# Altium PCB pyra_dvt1_power-2.0.PcbDoc
Units mm, origin at the board's own origin, x right, y up, seen from the top; angles counter-clockwise.
Board outline 250 x 177.5 mm, 2 copper layers (Top Layer, Bottom Layer); 72 components, 24 nets, 206 pads, 1 vias.
Unrouted connection lines stored in the file: 107.
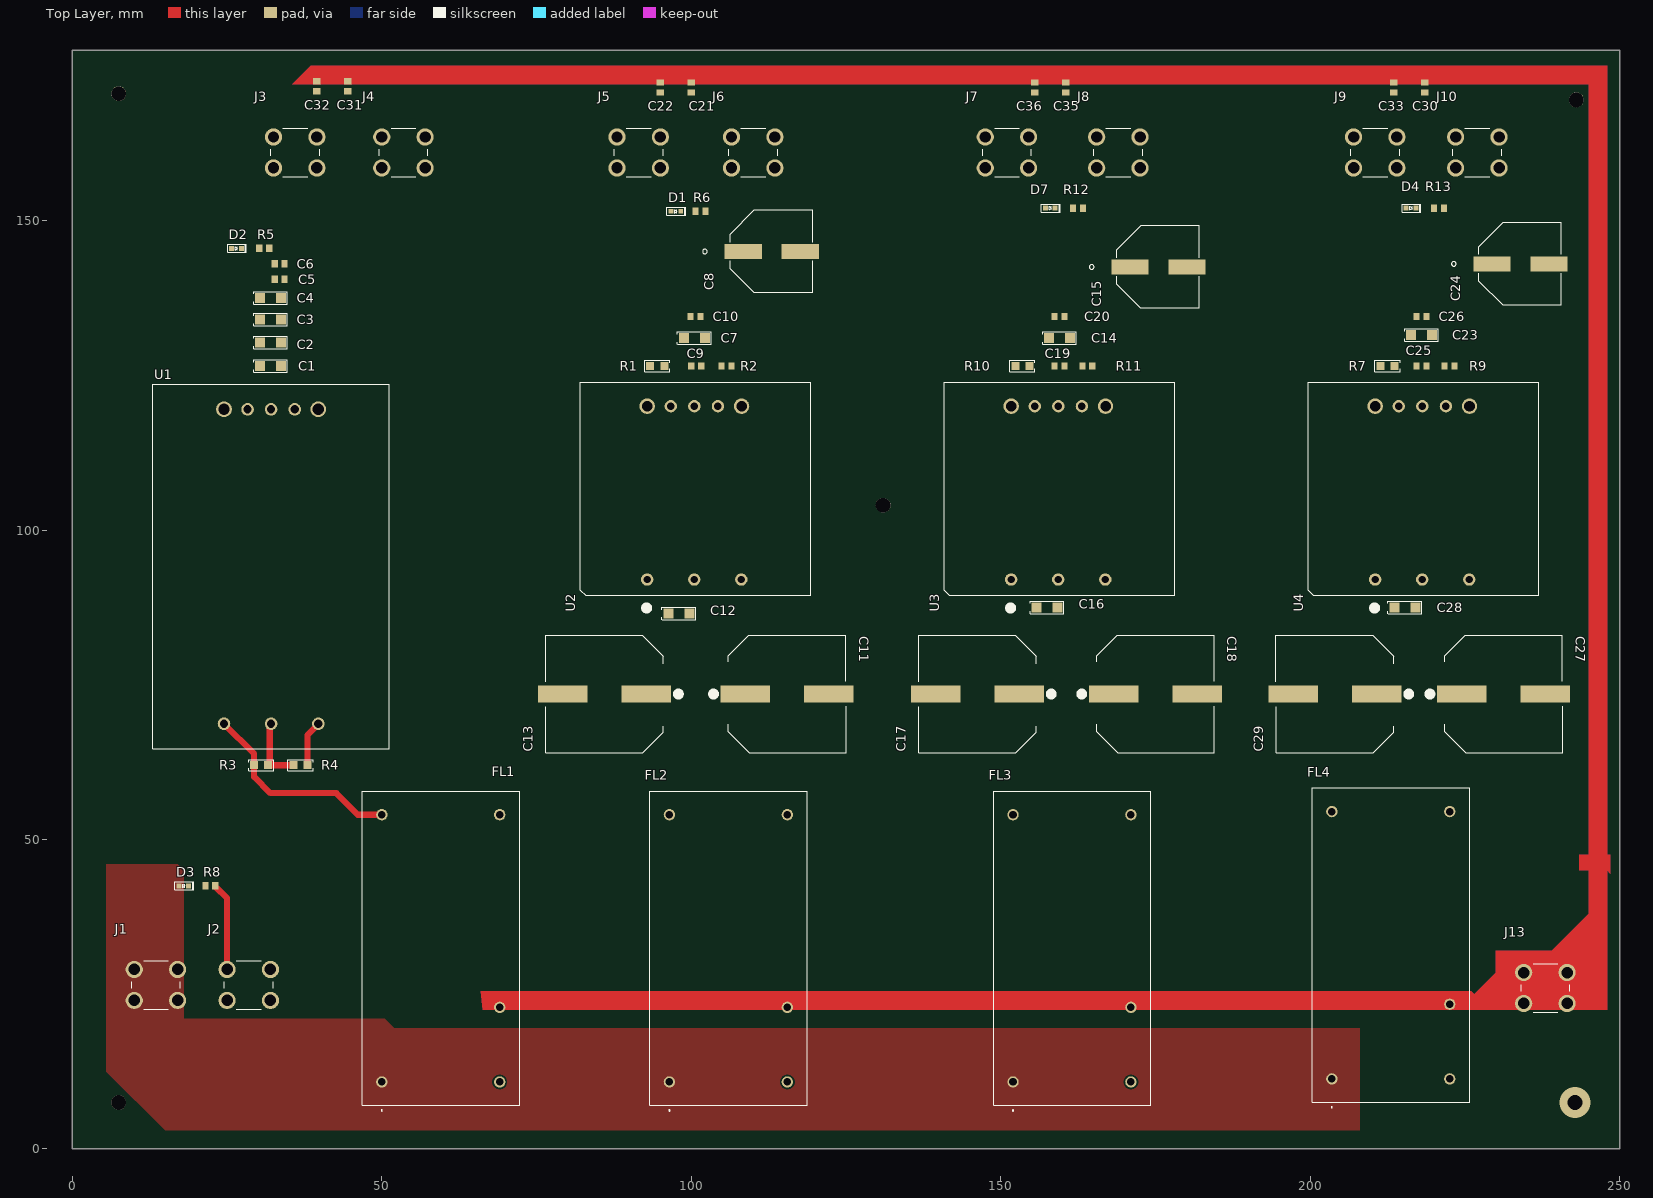
[diagram p0: Top Layer view]
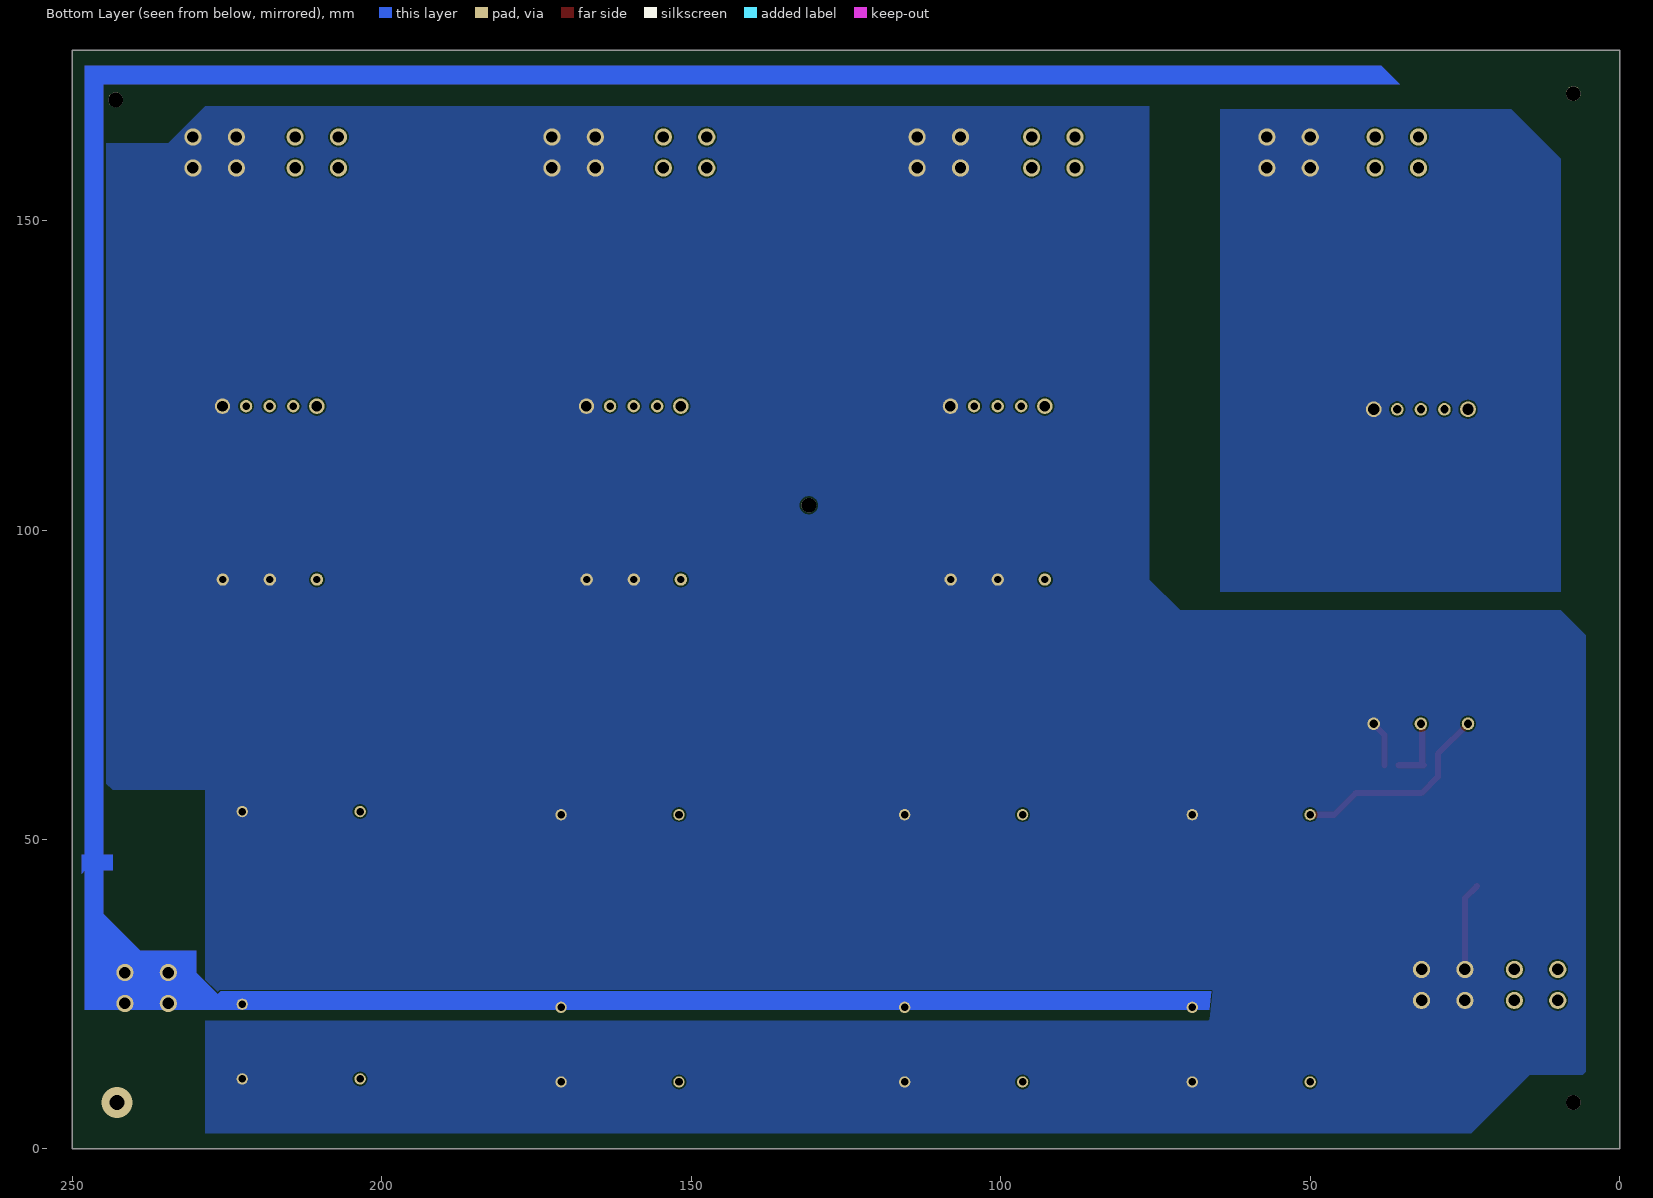
[diagram p1: Bottom Layer view, seen from below]

## Layer stack, top to bottom
Top Solder: solder mask 0.0102, Solder Resist, Dk 3.5
Top Layer: signal copper 0.0356
Dielectric 1: dielectric 0.32, FR-4, Dk 4.8
Bottom Layer: signal copper 0.0356
Bottom Solder: solder mask 0.0102, Solder Resist, Dk 3.5

## Board outline
0,0 0,177.5 250,177.5 250,0

## Design rules (kind name [scope] priority, off if disabled: settings)
Clearance [All] p1: gap=0.254 ignorepadtopadclearanceinfootprint=FALSE except(0: Arc-Hole Track-Hole SMDPad-Hole THPad-Hole Via-Hole Fill-Hole Poly-Hole Region-Hole Text-Hole)
PolygonConnect [All] p1: connectstyle=Direct reliefconductorwidth=0.254 reliefentries=4 polygonreliefangle="90 Angle" airgapwidth=0.254
RoutingVias [All] p1: holewidth=0.711 width=1.27 viastyle="Through Hole" minholewidth=0.711 minwidth=1.27 maxholewidth=0.711 maxwidth=1.27
SolderMaskExpansion [All] p1: expansion=0.102 istentingtop=FALSE
Width [All] p1: maxlimit=1 minlimit=0.1 preferedwidth=0.3
30 further rules are at their usual default settings.

## Components (designator, comment, footprint, x,y, rotation, side; value= is the part's Value field where it differs from the comment)
C1 "C1206_10UF_50V" 1206 32,126.5 r0 top value=10µF
C2 "C1206_10UF_50V" 1206 32,130.313 r0 top value=10µF
C3 "C1206_10UF_50V" 1206 32,134 r0 top value=10µF
C4 "C1206_10UF_50V" 1206 32,137.5 r0 top value=10µF
C5 "C0603_100NF_50V" 0603R(1608) 33.5,140.5 r0 top value=100nF
C6 "C0603_100NF_50V" 0603R(1608) 33.5,143 r0 top value=100nF
C7 "C1206_10UF_50V" 1206 100.5,131 r0 top value=10µF
C8 "330uF/50V" EMVH500ARA331MKG5S 113,145 r0 top
C9 "C0603_100NF_50V" 0603R(1608) 100.8,126.5 r0 top value=100nF
C10 "C0603_100NF_50V" 0603R(1608) 100.7,134.5 r0 top value=100nF
C11 "220uF/100V" EMVH101GDA221MMN0S 115.5,73.5 r0 top
C12 "C1206_10UF_50V" 1206 98,86.5 r0 top value=10µF
C13 "220uF/100V" EMVH101GDA221MMN0S 86,73.5 r180 top
C14 "C1206_10UF_50V" 1206 159.5,131 r0 top value=10µF
C15 "330uF/50V" EMVH500ARA331MKG5S 175.5,142.5 r0 top
C16 "C1206_10UF_50V" 1206 157.5,87.5 r0 top value=10µF
C17 "220uF/100V" EMVH101GDA221MMN0S 146.25,73.5 r180 top
C18 "220uF/100V" EMVH101GDA221MMN0S 175,73.5 r0 top
C19 "C0603_100NF_50V" 0603R(1608) 159.5,126.5 r0 top value=100nF
C20 "C0603_100NF_50V" 0603R(1608) 159.5,134.5 r0 top value=100nF
C21 "C0603_100NF_50V" 0603R(1608) 100,171.5 r90 top value=100nF
C22 "C0603_100NF_50V" 0603R(1608) 95,171.5 r90 top value=100nF
C23 "C1206_10UF_50V" 1206 218,131.5 r0 top value=10µF
C24 "330uF/50V" EMVH500ARA331MKG5S 234,143 r0 top
C25 "C0603_100NF_50V" 0603R(1608) 218,126.5 r0 top value=100nF
C26 "C0603_100NF_50V" 0603R(1608) 218,134.5 r0 top value=100nF
C27 "220uF/100V" EMVH101GDA221MMN0S 231.25,73.5 r0 top
C28 "C1206_10UF_50V" 1206 215.298,87.5 r0 top value=10µF
C29 "220uF/100V" EMVH101GDA221MMN0S 204,73.5 r180 top
C30 "C0603_100NF_50V" 0603R(1608) 218.5,171.5 r90 top value=100nF
C31 "C0603_100NF_50V" 0603R(1608) 44.5,171.7 r90 top value=100nF
C32 "C0603_100NF_50V" 0603R(1608) 39.5,171.7 r90 top value=100nF
C33 "C0603_100NF_50V" 0603R(1608) 213.5,171.5 r90 top value=100nF
C35 "C0603_100NF_50V" 0603R(1608) 160.5,171.5 r90 top value=100nF
C36 "C0603_100NF_50V" 0603R(1608) 155.5,171.5 r90 top value=100nF
D1 "APT1608EC" APT1608EC 97.5,151.5 r0 top
D2 "APT1608EC" APT1608EC 26.5,145.5 r0 top
D3 "APT1608EC" APT1608EC 18,42.5 r0 top
D4 "APT1608EC" APT1608EC 216.3,152 r0 top
D7 "APT1608EC" APT1608EC 158,152 r0 top
FL1 "VFM-10A" VFM10A 50,10.82 r90 top
FL2 "VFM-10A" VFM10A 96.467,10.82 r90 top
FL3 "VFM-10A" VFM10A 151.983,10.82 r90 top
FL4 "VFM-10A" VFM10A 203.5,11.32 r90 top
J1 "8191-2" 81912 10,23.996 r90 top
J2 "8191-2" 81912 25,23.996 r90 top
J3 "8191-2" 81912 32.5,158.496 r90 top
J4 "8191-2" 81912 49.99,158.496 r90 top
J5 "8191-2" 81912 88,158.496 r90 top
J6 "8191-2" 81912 106.5,158.496 r90 top
J7 "8191-2" 81912 147.5,158.496 r90 top
J8 "8191-2" 81912 165.5,158.496 r90 top
J9 "8191-2" 81912 207,158.496 r90 top
J10 "8191-2" 81912 223.5,158.496 r90 top
J13 "8191-2" 81912 234.5,23.5 r90 top
R1 "?" 0805 94.5,126.5 r180 top
R2 "1.3K" 0603R(1608) 105.7,126.5 r180 top
R3 "10k_0805" 0805 30.5,62 r0 top
R4 "10k_0805" 0805 36.857,62 r180 top
R5 "10k" 0603R(1608) 31,145.508 r0 top
R6 "10k" 0603R(1608) 101.5,151.5 r0 top
R7 "?" 0805 212.5,126.5 r180 top
R8 "10k" 0603R(1608) 22.3,42.5 r0 top
R9 "1.3K" 0603R(1608) 222.5,126.5 r180 top
R10 "?" 0805 153.5,126.5 r180 top
R11 "1.3K" 0603R(1608) 164,126.5 r180 top
R12 "10k" 0603R(1608) 162.5,152 r0 top
R13 "10k" 0603R(1608) 220.8,152.008 r0 top
U1 "CPE4D36P" CPE4D36N 32.12,94.1 r90 top
U2 "I7C4W008A120V-001-R" CPT2D36P 92.88,92 r90 top
U3 "I7C4W008A120V-001-R" CPT2D36P 151.69,92 r90 top
U4 "I7C4W008A120V-001-R" CPT2D36P 210.5,92 r90 top

## Footprints (in the part's own frame and the unit in brackets; to place one, negate y for a bottom-side part, rotate by r counter-clockwise, add the part's x,y. Pads: shape width x height; smd on the part's side, far side on the other; paste and mask are expansions set on the pad)
0603R(1608) [mm]
  rect 1x1.2 smd: 1(-0.8,0) 2(0.8,0)
  body extent -0.8,-0.4 0.8,0.4, height 0.9
0805 [mm]
  rect 1.3x1.3 smd: 1(-1.143,0) 2(1.143,0)
  silkscreen extent -2.03,-0.89 2.03,0.89, body extent -1,-0.63 1,0.63, height 0.78
1206 [mil]
  rect 64x64 smd: 1(-67,0) 2(67,0)
  silkscreen extent -108,-40 107,40, body extent -62,-31 64,31, height 39
81912 [mil]
  round 109.49 hole 73: 1(0,0) 2(197.01,0) 3(0,-275.98) 4(197.01,-275.98)
  silkscreen extent -56,-293 254,17, body extent -394,-133 394,133, height 228
APT1608EC [mm]
  rect 0.8x0.8 smd: 1(0.8,0) 2(-0.8,0)
  silkscreen extent -1.42,-0.64 1.6,0.64, body extent -0.8,-0.4 0.81,0.4, height 0.72
CPE4D36N [mil] "24V 4A 18-72VIN 8TH NEG ENB"
  round 80 hole 52: 1(-1000,300) 2(-1000,0) 3(-1000,-300) 5(1000,-150) 6(1000,0) 7(1000,150)
  round 100 hole 72: 4(1000,-300) 8(1000,300)
  silkscreen extent -1160,-752 1160,752, body extent -1160,-461 1159,461, height 500
CPT2D36P [mm] "DC DC CONVERTER 72W"
  round 2 hole 1.2 mask+0: 1(0,0) 2(0,-7.6) 3(0,-15.2) 5(28,-11.43) 6(28,-7.62) 7(28,-3.81)
  round 2.5 hole 1.7 mask+0: 4(28,-15.24) 8(28,0)
  silkscreen extent -4.98,-26.4 31.9,10.8, body extent -2.54,-26.09 31.5,10.74, height 12.09
EMVH101GDA221MMN0S [mm]
  rect 8x2.8 smd: 1(-6.75,0) 2(6.75,0)
  silkscreen extent -12.29,-9.53 9.53,9.47, body extent -9.53,-9.53 9.53,9.5, height 21.5
EMVH500ARA331MKG5S [mm]
  rect 6x2.42 smd: 1(-4.6,0) 2(4.6,0)
  silkscreen extent -11.17,-6.6 6.6,6.73, body extent -7.51,-6.82 7.51,6.87, height 14.05
VFM10A [mm]
  round 1.83 hole 1.22: 1(0,0) 2(0,-19.05) 3(43.18,0) 4(43.18,-19.05) 5(12.06,-19.05)
  silkscreen extent -4.7,-22.25 47,3.15, body extent -3.8,-22.25 47,3.15, height 11.8

## Part data
C1 C2 C3 C4 C7 C12 C14 C16 C23 C28: "CAP CER 10UF 50V X5R 1206", Capacitance=10µF, Manufacturer="TDK Corporation", Manufacturer Part Number=C3216X5R1H106M160AB, Manufacturer Two="Any equivalent to description", Manufacturer Two Part Number="Per manufacturer", Operating Temperature="-55°C ~ 85°C", Package / Case="1206 (3216 Metric)", Ratings=-, Supplier Part Number 1=445-5999-1-ND, Temperature Coefficient=X5R, Tolerance=±20%, Voltage - Rated=50V, Applications="General Purpose", Category=Capacitors, ComponentLink1Description=https://product.tdk.com/info/en/catalog/datasheets/mlcc_commercial_general_en.pdf, ComponentLink1URL=https://product.tdk.com/info/en/catalog/datasheets/mlcc_commercial_general_en.pdf, Failure Rate=-, Features="Low ESL", Height - Seated (Max)=-, Lead Spacing=-, Lead Style=-, Mounting Type="Surface Mount, MLCC", Packaging="Cut Tape (CT)", Part Status=Active, Pricing 1="1=0.93, 10=0.706, 100=0.5053, 1000=0.33689 (USD)", RoHS="RoHS Compliant", Size=1206, Size / Dimension="0.126\" L x 0.063\" W (3.20mm x 1.60mm)", Stock 1=17969, Supplier 1=Digi-Key, Thickness (Max)="0.071\" (1.80mm)"
C5 C6 C9 C10 C19 C20 C21 C22 C25 C26 C30 C31 C32 C33 C35 C36: "CAP CER 0.1UF 50V X5R 0603", Capacitance=0.1µF, Manufacturer="TDK Corporation", Manufacturer Part Number=CGA3E2X5R1H104K080AA, Manufacturer Two="Any equivalent to description", Manufacturer Two Part Number="Per manufacturer", Operating Temperature="-55°C ~ 85°C", Package / Case="0603 (1608 Metric)", Ratings=AEC-Q200, Supplier Part Number 1=445-12498-1-ND, Temperature Coefficient=X5R, Tolerance=±10%, Voltage - Rated=50V, Applications=Automotive, Category=Capacitors, ComponentLink1Description=https://product.tdk.com/info/en/catalog/datasheets/mlcc_automotive_general_en.pdf, ComponentLink1URL=https://product.tdk.com/info/en/catalog/datasheets/mlcc_automotive_general_en.pdf, Failure Rate=-, Features=-, Height - Seated (Max)=-, Lead Spacing=-, Lead Style=-, Mounting Type="Surface Mount, MLCC", Packaging="Cut Tape (CT)", Part Status=Active, Pricing 1="1=0.1, 10=0.076, 25=0.0552, 50=0.0414, 100=0.0338, 250=0.02828, 500=0.02416, 1000=0.01898 (USD)", RoHS="RoHS Compliant", Size / Dimension="0.063\" L x 0.031\" W (1.60mm x 0.80mm)", Stock 1=8997, Supplier 1=Digi-Key, Thickness (Max)="0.035\" (0.90mm)"
C8 C15 C24: library part "CAP POLAR  330uF", "CAP ALUM 330UF 20% 50V SMD", Capacitance=330uF, Case/Package=Radial, Leakage Current=4uA, Manufacturer="United Chemi-con", Manufacturer Part Number=EMVH500ARA331MKG5S, Max Operating Temperature=125°C, Min Operating Temperature=-40°C, Package Quantity=200, Ripple Current=350mA, Supplier Part Number 1=565-2329-2-ND, Tolerance=20%, Voltage Rating=50V, _Verified BOM=.mfr-pn?, _Verified Footprint=".mfr-pn? footprint?", _Verified Symbol=.mfr-pn?, Category="Aluminum Electrolytic Capacitors", ComponentLink1Description=https://www.chemi-con.com/upload/files/9/3/45226975052d6c71e04ba0.pdf, ComponentLink1URL=https://www.chemi-con.com/upload/files/9/3/45226975052d6c71e04ba0.pdf, Diameter=12.5mm, Height=13mm, Lead Free="Lead Free", Length=13mm, Life (Hours)=5000Hour, Number of Pins=2, Packaging="Tape and Reel", Radiation Hardening=No, RoHS=Yes, Stock 1=1200, Supplier 1=Digi-Key, Termination=SMD/SMT, Voltage Rating (DC)=50V
C11 C13 C17 C18 C27 C29: library part "CAP POLAR  220uF", "CAP ALUM 220UF 20% 100V SMD", Capacitance=220uF, Case/Package=Radial, Leakage Current=4uA, Manufacturer=Panasonic, Manufacturer Part Number=EEV-TG2A221M, Max Operating Temperature=125°C, Min Operating Temperature=-40°C, Package Quantity=125, Ripple Current=400mA, Supplier Part Number 1=PCE3698TR-ND, Tolerance=20%, Voltage Rating=100V, _Verified BOM=.mfr-pn?, _Verified Footprint=".mfr-pn? footprint?", _Verified Symbol=.mfr-pn?, Category="Aluminum Electrolytic Capacitors", Diameter=18mm, Height=16.5mm, Lead Free="Lead Free", Length=16.5mm, Life (Hours)=5000Hour, Number of Pins=2, Packaging="Tape and Reel", Radiation Hardening=No, RoHS=Yes, Stock 1=875, Supplier 1=Digi-Key, Termination=SMD/SMT, Voltage Rating (DC)=100V
  C11 C18 C27: ComponentLink1Description=https://industrial.panasonic.com/cdbs/www-data/pdf/RDE0000/ABA0000C1187.pdf, ComponentLink1URL=https://industrial.panasonic.com/cdbs/www-data/pdf/RDE0000/ABA0000C1187.pdf*
  C13 C17 C29: ComponentLink1Description=https://www.chemi-con.com/upload/files/9/3/45226975052d6c71e04ba0.pdf, ComponentLink1URL=https://www.chemi-con.com/upload/files/9/3/45226975052d6c71e04ba0.pdf
D1 D2 D3 D4 D7: library part LED_red_0603, "red, 0603", Case Code (Imperial)=0603, Case Code (Metric)=1608, Color=Red, Forward Current=20mA, Forward Voltage=2V, Lens Color=Clear, Manufacturer=Kingbright, Max Operating Temperature=85°C, Min Operating Temperature=-40°C, Package Quantity=2000, Supplier Part Number 1=754-1117-6-ND, Case/Package=0603, ComponentLink1Description=http://www.kingbrightusa.com/images/catalog/SPEC/APT1608EC.pdf?src-supplier=Digi-Key, ComponentLink1URL=http://www.kingbrightusa.com/images/catalog/SPEC/APT1608EC.pdf?src-supplier=Digi-Key, ComponentLink2Description=https://www.alliedelec.com/m/d/8f77ba6adbc677900716b25e6ddbc771.pdf?src-supplier=Allied+Electronics, ComponentLink2URL=https://www.alliedelec.com/m/d/8f77ba6adbc677900716b25e6ddbc771.pdf?src-supplier=Allied+Electronics, ComponentLink3Description=http://www.kingbrightusa.com/images/catalog/SPEC/APT1608EC.pdf?src-supplier=Future+Electronics, ComponentLink3URL=http://www.kingbrightusa.com/images/catalog/SPEC/APT1608EC.pdf?src-supplier=Future+Electronics, Dominant Wavelength=625nm, Height=0.75mm, Illumination Color=Red, Lead Free="Lead Free", Length=1.6mm, Lens Style=Clear,Flat, Luminous Intensity=12mcd, Manufacturer Part Number=APT1608EC, Mount="Surface Mount", Number of LEDs=1, Number of Pins=2, Packaging="Tape and Reel", Pricing 1="1=0.35, 10=0.259, 25=0.1912, 100=0.1365, 250=0.09284, 500=0.0819, 1000=0.06416 (USD)", Stock 1=93649, Supplier 1=Digi-Key, Test Current=20mA, Viewing Angle=120°, Wavelength=625nm, Width=0.8mm
FL1 FL2 FL3 FL4: library part CMP-002-000003-1, "Power Line Filters 0-75Vin 10A DC EMI Filter", Manufacturer_Name="CUI Inc.", Mouser Part Number=490-VFM-10A, Arrow Part Number=VFM-10A, Arrow Price/Stock=https://www.arrow.com/en/products/vfm-10a/cui-inc, Datasheet Link=https://www.cui.com/product/resource/vfm-xx.pdf, Design Item ID=VFM-10A, Height=11.7mm, Manufacturer_Part_Number=VFM-10A, Mouser Price/Stock=https://www.mouser.co.uk/ProductDetail/CUI-Inc/VFM-10A?qs=WyjlAZoYn52c0yYVx%252BhHOQ%3D%3D, Source=SamacSys.SchLib
J1 J2 J3 J4 J5 J6 J7 J8 J9 J10 J13: library part CMP-002-000000-1, "Keystone, Brass Screw Terminal, 22  14 AWG, 15A", Manufacturer_Name="Keystone Electronics", Mouser Part Number=534-8191-2, Design Item ID=8191-2, Geometry.Height=11.176mm, Manufacturer_Part_Number=8191-2, Mouser Price/Stock=https://www.mouser.co.uk/ProductDetail/Keystone-Electronics/8191-2?qs=zBlGwAMnvtcLi4%252BTp6EI2A%3D%3D, Source=8191-2.SchLib
R1 R7 R10: library part "RES .val? 0805", "RES 100 OHM 5% 1/4W 0805", Case Code (Imperial)=0805, Case Code (Metric)=2012, Manufacturer=KOA, Manufacturer Part Number=RK73B2ATTD101J, Max Operating Temperature=155°C, Max Power Dissipation=250mW, Min Operating Temperature=-55°C, Package Quantity=1, Resistance=100R, Resistor Type="Thick Film", Supplier Part Number 1=2019-RK73B2ATTD101JTR-ND, Temperature Coefficient=200ppm/°C, Tolerance=5%, _Verified BOM=.mfr-pn?, _Verified Footprint=".mfr-pn? footprint?", _Verified Symbol=.mfr-pn?, Case/Package=0805, Category="Chip SMD Resistors", ComponentLink1Description=https://www.koaspeer.com/pdfs/RK73B.pdf, ComponentLink1URL=https://www.koaspeer.com/pdfs/RK73B.pdf, Features="Automotive AEC-Q200", Height=0.024inch, Length=0.079inch, Number of Terminations=2, Packaging="Tape and Reel", Pricing 1="1=0.14000, 10=0.12400, 100=0.04790, 1000=0.02105, 2500=0.01818 (USD)", RoHS=Yes, Stock 1=4773, Supplier 1=Digi-Key, Width=0.049inch
R2 R9 R11: library part "RES .val? .pkg?", "RES SMD 1.3K OHM 1% 1/10W 0603", Case Code (Imperial)=0603, Case Code (Metric)=1608, Manufacturer=Panasonic, Manufacturer Part Number=ERJ-3EKF1301V, Max Operating Temperature=155°C, Max Power Dissipation=100mW, Min Operating Temperature=-55°C, Supplier Part Number 1=P1.30KHTR-ND, Temperature Coefficient=100ppm/°C, Tolerance=1%, _Verified BOM=.mfr-pn?, _Verified Footprint=".mfr-pn? footprint?", _Verified Symbol=.mfr-pn?, Case/Package=0603, Category="Chip SMD Resistors", ComponentLink1Description=https://industrial.panasonic.com/cdbs/www-data/pdf/RDA0000/AOA0000C304.pdf, ComponentLink1URL=https://industrial.panasonic.com/cdbs/www-data/pdf/RDA0000/AOA0000C304.pdf, Composition="Thick Film", Depth=0.8mm, Height=0.022inch, Length=0.061inch, Mount="Surface Mount", Number of Terminations=2, Packaging="Tape and Reel", Power Rating=100mW, REACH SVHC="No SVHC", Resistance=1.3K, RoHS=Yes, Supplier 1=Digi-Key, Termination=Solder, Width=0.031inch
R3 R4: library part "RES 10k_0805", "Res Thick Film 0805 10K Ohm 1% 0.125W ±100ppm/°C Molded SMD Paper T/R", Case Code (Imperial)=0805, Case Code (Metric)=2012, Manufacturer="Stackpole Electronics", Manufacturer Part Number=RMCF0805FT10K0, Max Operating Temperature=155°C, Max Power Dissipation=125mW, Min Operating Temperature=-55°C, Resistance=10kR, Resistor Type="Thick Film", Supplier Part Number 1=RMCF0805FT10K0TR-ND, Temperature Coefficient=100ppm/°C, Tolerance=1%, Case/Package=0805, Category="Chip SMD Resistors", ComponentLink1Description=https://datasheet.ciiva.com/11821/0900766b80f80784-11821667.pdf?src-supplier=RSComponents, ComponentLink1URL=https://datasheet.ciiva.com/11821/0900766b80f80784-11821667.pdf?src-supplier=RSComponents, ComponentLink2Description=https://datasheet.ciiva.com/46381/1678782-46381561.pdf?src-supplier=Element14, ComponentLink2URL=https://datasheet.ciiva.com/46381/1678782-46381561.pdf?src-supplier=Element14, ComponentLink3Description=https://datasheet.ciiva.com/22682/1678782-22682207.pdf?src-supplier=Element14, ComponentLink3URL=https://datasheet.ciiva.com/22682/1678782-22682207.pdf?src-supplier=Element14, ComponentLink4Description=https://datasheet.ciiva.com/46381/1678782-46381560.pdf?src-supplier=Element14, ComponentLink4URL=https://datasheet.ciiva.com/46381/1678782-46381560.pdf?src-supplier=Element14, ComponentLink5Description=https://datasheet.ciiva.com/24026/aoa0000ce2-24026488.pdf?src-supplier=Mouser, ComponentLink5URL=https://datasheet.ciiva.com/24026/aoa0000ce2-24026488.pdf?src-supplier=Mouser, ComponentLink6Description=https://datasheet.ciiva.com/16788/70260748-16788109.pdf?src-supplier=Allied+Electronics, ComponentLink6URL=https://datasheet.ciiva.com/16788/70260748-16788109.pdf?src-supplier=Allied+Electronics, ComponentLink7Description=https://datasheet.ciiva.com/16774/70260748-16774949.pdf?src-supplier=Allied+Electronics, ComponentLink7URL=https://datasheet.ciiva.com/16774/70260748-16774949.pdf?src-supplier=Allied+Electronics, ComponentLink8Description=https://datasheet.ciiva.com/30051/aoa0000ce2-30051758.pdf?src-supplier=Onlinecomponents.com, ComponentLink8URL=https://datasheet.ciiva.com/30051/aoa0000ce2-30051758.pdf?src-supplier=Onlinecomponents.com, ComponentLink9Description=https://datasheet.ciiva.com/17209/aoa0000ce2-17209430.pdf?src-supplier=Avnet+Europe, ComponentLink9URL=https://datasheet.ciiva.com/17209/aoa0000ce2-17209430.pdf?src-supplier=Avnet+Europe, ComponentLink10Description=https://datasheet.ciiva.com/15193/getdatasheetpartid-362046-15193525.pdf?src-supplier=Verical, ComponentLink10URL=https://datasheet.ciiva.com/15193/getdatasheetpartid-362046-15193525.pdf?src-supplier=Verical, Construction=Rectangular, Contact Plating=Tin,Matte, Depth=1.25mm, Features="Automotive AEC-Q200", Height=0.026inch, Lead Free="Lead Free", Length=2mm, Military Standard=Not, Mount="Surface Mount", Number of Terminations=2, Packaging="Tape and Reel", Power Rating=125mW, Pricing 1="5000=0.00350 (USD)", Radiation Hardening=No, RoHS=Yes, ROHS COMPLIANT=Yes, Series=RMCF, Size Code=0805, Stock 1=10552273, Supplier 1=Digi-Key, Width=0.049inch
R5 R6 R12 R13: library part RES-0603-10K_1, "RES SMD 10K OHM 5% 1/10W 0603", Manufacturer="Panasonic Electronic Components", Manufacturer Part Number=RMCF0603FT7K15, Manufacturer Two="Any equivalent to description", Manufacturer Two Part Number="Per manufacturer", Package / Case="0603 (1608 Metric)", Power (Watts)="0.1W, 1/10W", Resistance (Ohms)=7.15K, Supplier Part Number 1=RMCF0603FT7K15TR-ND, Temperature Coefficient=±100ppm/°C, Tolerance=±1%, ComponentLink1URL=http://industrial.panasonic.com/www-cgi/jvcr13pz.cgi?E+PZ+3+AOA0002+ERJ3EKF1200V+7+WW, Composition="Thick Film", Height="0.022\" (0.55mm)", Packaging="Cut Tape (CT)", Pin Count=2, Proto Cost @ 100=0.0068, RoHS="RoHS Compliant", Series=RMC, Size / Dimension="0.063\" L x 0.031\" W (1.60mm x 0.80mm)", Supplier 1=Digi-Key, Validated=-
R8: library part RES-0603-10K_1, "RES SMD 10K OHM 5% 1/10W 0603", Manufacturer="Panasonic Electronic Components", Manufacturer Part Number=RMCF0603FT7K15, Manufacturer Two="Any equivalent to description", Manufacturer Two Part Number="Per manufacturer", Package / Case="0603 (1608 Metric)", Power (Watts)="0.1W, 1/10W", Resistance (Ohms)=16K, Supplier Part Number 1=RMCF0603FT7K15TR-ND, Temperature Coefficient=±100ppm/°C, Tolerance=±1%, ComponentLink1URL=http://industrial.panasonic.com/www-cgi/jvcr13pz.cgi?E+PZ+3+AOA0002+ERJ3EKF1200V+7+WW, Composition="Thick Film", Height="0.022\" (0.55mm)", Packaging="Cut Tape (CT)", Pin Count=2, Proto Cost @ 100=0.0068, RoHS="RoHS Compliant", Series=RMC, Size / Dimension="0.063\" L x 0.031\" W (1.60mm x 0.80mm)", Supplier 1=Digi-Key, Validated=-
U1: library part CPE4D36N, "Isolated Module DC DC Converter 1 Output 24V    4A 18V - 72V Input", Manufacture2=NetPower, Manufacturer="Semiconductor Circuits, Inc.", Manufacturer2 Part Number=ERS3240N004N25W, Category="Board Mount Modules", Manufacturer Part Number=CPE4D36P, Notes="NetPower fit R38 remove R37", RoHS=No, Stock 1=37, Supplier 1=Digi-Key
U2 U3 U4: "DC DC CONVERTER 9.6-48V OUTPUT 300W 8A 9V - 53V INPUT", Manufacturer=TDK-Lambda, Category="Board Mount Modules", Manufacturer Part Number=I7C4W008A120V-001-R, RoHS=Yes, Supplier 1=Digikey

## Free pads (board coordinates)
  round 2.4 hole 2.4 unplated mask+2: MH(7.5,7.5) MH(7.5,170.5) MH(131,104) MH(243,169.5)

## Via types
v1: diameter 5, hole 2.4, Top Layer to Bottom Layer, 1 vias

## Nets (pads, with @x,y where several pads share a name; then routed paths per layer and width w, separated by ;. In a path a pad name is that pad's centre, name@x,y a point inside that pad or via, vN(x,y) a via of type N, cw(c..) or ccw(c..) an arc to the next point about the centre after c; other vN are vias at no path point)
EN_24V_I: R3.2 R4.2 U1.2 | length 11
  Top Layer w0.5: R3.2 R3.2@31.882,62.239 ; U1.2@31.882,68.462 U1.2
  Top Layer w1: R3.2 R4.2 ; R3.2@31.882,62.239 U1.2@31.882,68.462
GND: C21.2 C22.2 C30.2 C31.2 C32.2 C33.2 C35.2 C36.2 FL1.5 FL2.5 FL3.5 FL4.5 J13.1 J13.2 J13.3 J13.4
  other v1: 242.8,7.5
MTR_24_SENSE1: R1.1 U2.7
MTR_24_SENSE2: R10.1 U3.7
MTR_24_SENSE3: R7.1 U4.7
MTR_24_TRIM1: R2.2 U2.6
MTR_24_TRIM2: R11.2 U3.6
MTR_24_TRIM3: R9.2 U4.6
NetD1_1: D1.1 R6.1
NetD2_1: D2.1 R5.1
NetD3_1: D3.1 R8.1
NetD4_1: D4.1 R13.1
NetD7_1: D7.1 R12.1
P24V_ISO: C1.1 C2.1 C3.1 C4.1 C5.1 C6.1 C32.1 D2.2 J3.1 J3.2 J3.3 J3.4 U1.8
P24V_ISO_Filtered: FL1.3 R3.1 U1.1 | length 33.8
  Top Layer w1: U1.1 29.357,63.843 R3.1 29.357,60.143 32,57.5 42.625,57.5 46.125,54 FL1.3
P24V_MTR1: C7.1 C8.1 C9.1 C10.1 C22.1 D1.2 J5.1 J5.2 J5.3 J5.4 R1.2 U2.8
P24V_MTR1_Filtered: C11.1 C12.1 C13.1 FL2.3 U2.1
P24V_MTR2: C14.1 C15.1 C19.1 C20.1 C36.1 D7.2 J7.1 J7.2 J7.3 J7.4 R10.2 U3.8
P24V_MTR2_Filtered: C16.1 C17.1 C18.1 FL3.3 U3.1
P24V_MTR3: C23.1 C24.1 C25.1 C26.1 C33.1 D4.2 J9.1 J9.2 J9.3 J9.4 R7.2 U4.8
P24V_MTR3_Filtered: C27.1 C28.1 C29.1 FL4.3 U4.1
P48V: D3.2 FL1.1 FL2.1 FL3.1 FL4.1 J1.1 J1.2 J1.3 J1.4
RTN24_ISO: C1.2 C2.2 C3.2 C4.2 C5.2 C6.2 C31.1 J4.1 J4.2 J4.3 J4.4 R5.2 U1.4
RTN48V: C7.2 C8.2 C9.2 C10.2 C11.2 C12.2 C13.2 C14.2 C15.2 C16.2 C17.2 C18.2 C19.2 C20.2 C21.1 C23.2 C24.2 C25.2 C26.2 C27.2 C28.2 C29.2 C30.1 C35.1 FL1.2 FL1.4 FL2.2 FL2.4 FL3.2 FL3.4 FL4.2 FL4.4 J2.1 J2.2 J2.3 J2.4 J6.1 J6.2 J6.3 J6.4 J8.1 J8.2 J8.3 J8.4 J10.1 J10.2 J10.3 J10.4 R2.1 R4.1 R6.2 R8.2 R9.1 R11.1 R12.2 R13.2 U1.3 U2.2 U2.3 U2.4 U3.2 U3.3 U3.4 U4.2 U4.3 U4.4 | length 21.7
  Top Layer w1: R8.2 23.1,42.4 25,40.5 J2.2 ; R4.1 38,66.882 39.74,68.622 U1.3
pads on no net: U1.5 U1.6 U1.7 U2.5 U3.5 U4.5

## Polygon pours and split planes (outlines as drawn)
RTN48V on Bottom Layer "48v return" (solid, pour order 1): 9.5,87 5.5,83 5.5,12.5 6,12 14.5,12 15,11.5 24,2.5 228.5,2.5 228.5,58 243.5,58 244.5,59 244.5,162.5 234.5,162.5 228.5,168.5 76,168.5 76,92 71,87
RTN24_ISO on Bottom Layer "24v iso return" (solid, pour order 0): 9.5,90 9.5,160 17.5,168 64.5,168 64.5,90
P48V on Top Layer "48v" (solid, pour order 2): 5.5,46 5.5,12.5 15,3 208,3 208,19.5 52,19.5 50.5,21 18,21 18,45 17,46

## Other copper
Multi-Layer:
  region net GND: 248.5,47.5 243.5,47.5 243.5,45 248,45 248.5,44.5
  region net GND: 66.333,22.5 229,22.5 248,22.5 248,175 38.5,175 35.5,172 245,172 245,38 239,32 230,32 230,28.5 226.5,25 226,25.5 66,25.5